# Altium PCB VCO_BFR92_pcb.PcbDoc
Units mil, origin at the board's own origin, x right, y up, seen from the top; angles counter-clockwise.
Board outline 2385 x 1195 mil, 2 copper layers (Top Layer, Bottom Layer); 40 components, 21 nets, 91 pads, 81 vias.
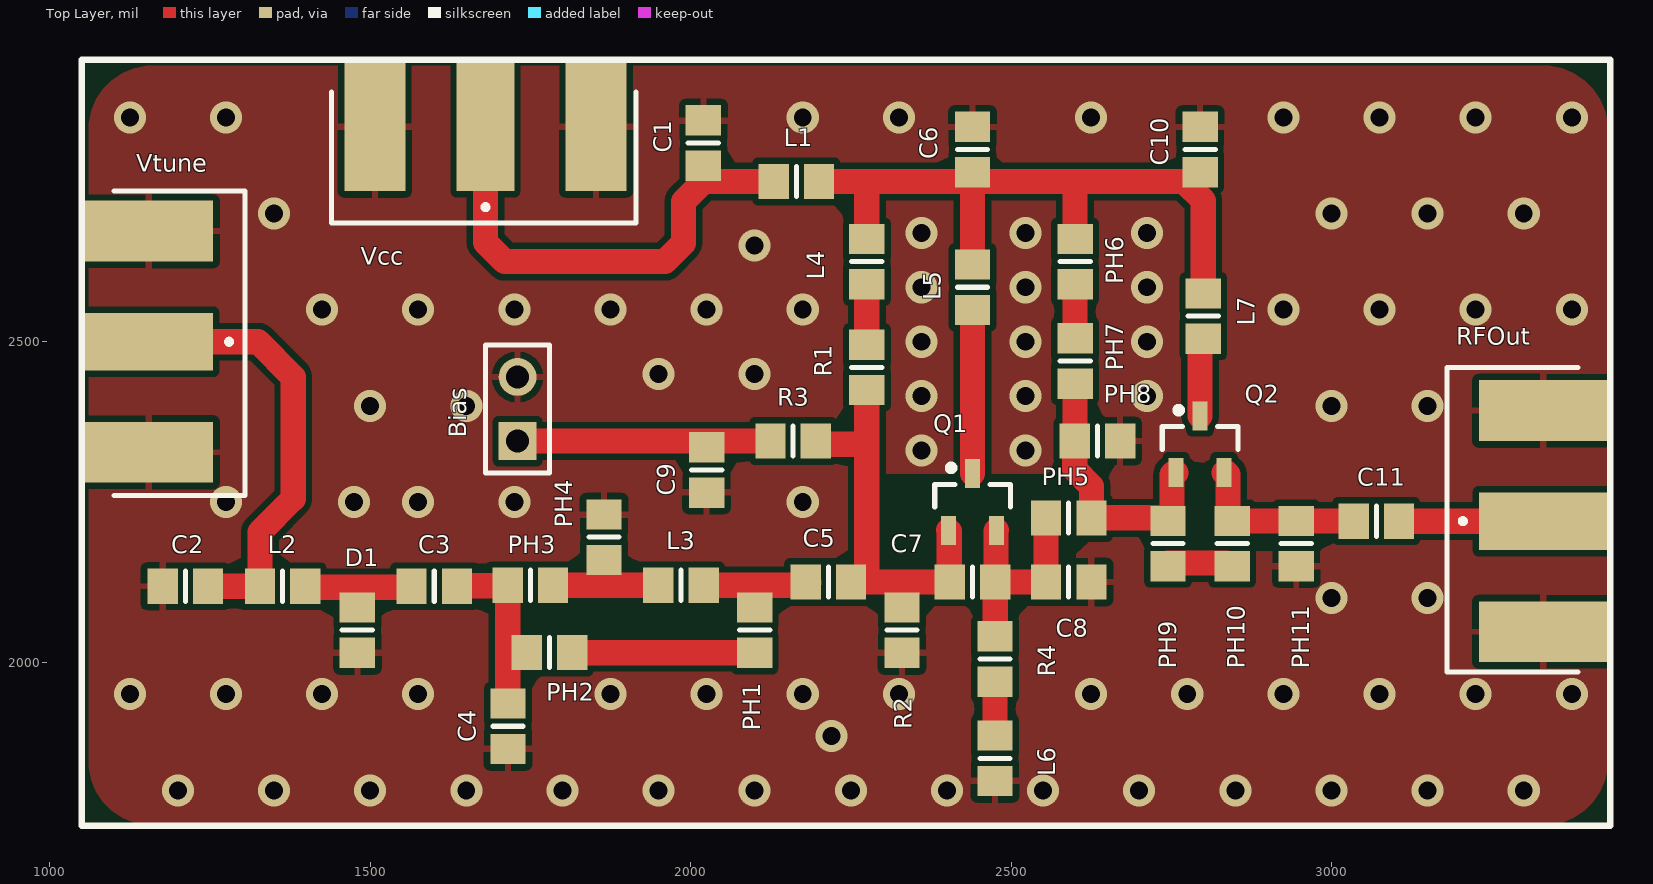
[diagram p0: Top Layer view]
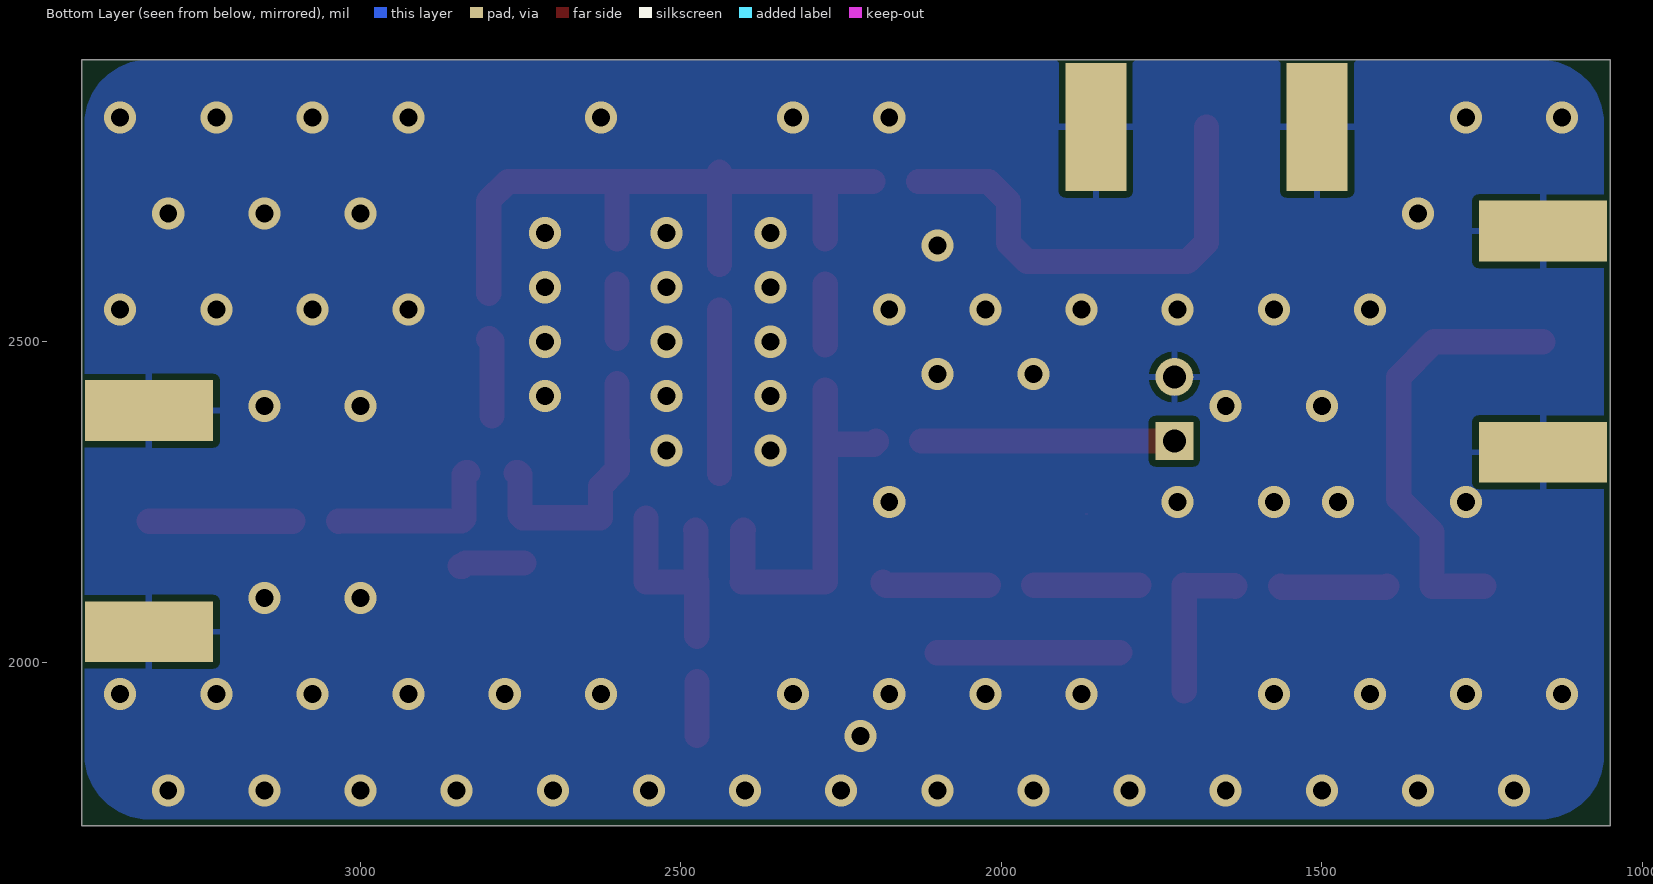
[diagram p1: Bottom Layer view, seen from below]

## Layer stack, top to bottom
Top Solder: solder mask 0.4, Solder Resist, Dk 3.5
Top Layer: signal copper 1.4
Dielectric 1: dielectric 12.6, FR-4, Dk 4.8
Bottom Layer: signal copper 1.4
Bottom Solder: solder mask 0.4, Solder Resist, Dk 3.5

## Board outline
1050,1745 1050,2940 3435,2940 3435,1745

## Design rules (kind name [scope] priority, off if disabled: settings)
Clearance [All] p1: gap=10 ignorepadtopadclearanceinfootprint=FALSE except(0: Arc-Hole Track-Hole SMDPad-Hole THPad-Hole Via-Hole Fill-Hole Poly-Hole Region-Hole Text-Hole)
PolygonConnect PolygonConnect_Via [IsPolygon vs IsVia] p1: connectstyle=Direct reliefconductorwidth=10 reliefentries=4 polygonreliefangle="90 Angle" airgapwidth=10
PolygonConnect [All] p2: connectstyle=Relief reliefconductorwidth=10 reliefentries=4 polygonreliefangle="90 Angle" airgapwidth=10
RoomDefinition VCO_BFR92_sh [InComponentClass('VCO_BFR92_sh')] p1: confinementstyle=ConfineIn formatcopy=TRUE lockcomponents=FALSE outline 175,996.02 4105,996.02 4105,3650 175,3650
RoutingVias [All] p1: holewidth=28 width=50 viastyle="Through Hole" minholewidth=28 minwidth=50 maxholewidth=28 maxwidth=50
SolderMaskExpansion [All] p1: expansion=4
Width [All] p1: maxlimit=78.74 minlimit=10 preferedwidth=10
30 further rules are at their usual default settings.

## Components (designator, comment, footprint, x,y, rotation, side; value= is the part's Value field where it differs from the comment)
Bias "Header 2" HDR1X2 1730,2345 r90 top
C1 "Cap Pol2" 6-0805_N 2020,2810 r90 top value=47nF
C2 "Cap Pol2" 6-0805_N 1211.68,2118.43 r180 top value=47nF
C3 "Cap Pol2" 6-0805_N 1600,2118.43 r0 top value=4.3pF
C4 "Cap Pol2" 6-0805_N 1715,1900 r270 top value=0.6pF
C5 "Cap Pol2" 6-0805_N 2215,2125 r0 top value=100pF
C6 "Cap Pol2" 6-0805_N 2440,2800 r90 top value=47pF
C7 "Cap Pol2" 6-0805_N 2440,2125 r0 top value=1pF
C8 "Cap Pol2" 6-0805_N 2590,2125 r0 top value=3pF
C9 "Cap Pol2" 6-0805_N 2025,2300 r270 top value="no mounted"
C10 "Cap Pol2" 6-0805_N 2795,2800 r90 top value=47pF
C11 "Cap Pol2" 6-0805_N 3070,2220 r0 top value=33pF
D1 "D Varactor" 6-0805_N 1480,2050 r270 top
L1 "Inductor" 6-0805_N 2165,2750 r0 top value=10mH
L2 "Inductor" 6-0805_N 1363.43,2118.43 r0 top value=100nH
L3 "Inductor" 6-0805_N 1985,2120 r0 top value=10mH
L4 "Inductor" 6-0805_N 2275,2625 r90 top value=10mH
L5 "Inductor" 6-0805_N 2440,2585 r90 top value=10mH
L6 "Inductor" 6-0805_N 2475,1850 r90 top value=10mH
L7 "Inductor" 6-0805_N 2800,2540 r90 top value=10mH
PH1 "Res1" 6-0805_N 2100,2050 r90 top value=0
PH2 "0" 6-0805_N 1780,2015 r0 top value=1K
PH3 "Res1" 6-0805_N 1750,2120 r180 top value=1K
PH4 "Res1" 6-0805_N 1865,2195 r270 top value=0
PH5 "Res1" 6-0805_N 2590,2225 r180 top value=1K
PH6 "Res1" 6-0805_N 2600,2625 r90 top value=1K
PH7 "Res1" 6-0805_N 2600,2470 r90 top value=1K
PH8 "Res1" 6-0805_N 2635,2345 r180 top value=1K
PH9 "Res1" 6-0805_N 2745,2185 r270 top value=1K
PH10 "Res1" 6-0805_N 2845,2185 r270 top value=1K
PH11 "Res1" 6-0805_N 2945,2185 r270 top value=1K
Q1 "NPN" SOT23_N 2440,2250 r90 top
Q2 "NPN" SOT23_N 2795,2340 r90 top
R1 "Res1" 6-0805_N 2275,2460 r90 top value=1.5K
R2 "Res1" 6-0805_N 2330,2050 r90 top value=2.7K
R3 "Res1" 6-0805_N 2160,2345 r180 top value=1K
R4 "Res1" 6-0805_N 2475,2005 r90 top value=220
RFOut "SMB" SMA-142-0701-851 3330,2220 r90 top
Vcc "SMB" SMA-142-0701-851 1680,2835 r180 top
Vtune "SMB" SMA-142-0701-851 1155,2500 r270 top

## Footprints (in the part's own frame and the unit in brackets; to place one, negate y for a bottom-side part, rotate by r counter-clockwise, add the part's x,y. Pads: shape width x height; smd on the part's side, far side on the other; paste and mask are expansions set on the pad)
6-0805_N [mm] "Chip Resistor, Body 2.0x1.2mm, IPC Medium Density"
  rect 1.2x1.4 smd: 1(-0.9,0) 2(0.9,0)
  silkscreen extent 0,-0.6 0,0.6, body extent -1.07,-0.7 1.07,0.7, height 0.7
HDR1X2 [mm] "Connector; Header; 2 Position"
  rect 1.5x1.5 hole 0.9: 1(0,0)
  round 1.5 hole 0.9: 2(2.54,0)
  silkscreen extent -1.27,-1.27 3.81,1.27
SMA-142-0701-851 [mil] "SMA 50 Ohm, End Launch Jack Receptacle, Tab Contact"
  rect 90x200 smd: 1(0,0)
  rect 95x200 smd: 2(-172.5,0) 2(172.5,0)
  rect 95x200 smd far side: 2(-172.5,0) 2(172.5,0)
  silkscreen extent -235,-55 240,150, body extent -187,-475 188,87, height 161
SOT23_N [mm] "SOT23, 3-Leads, Body 2.9x1.3mm, Pitch 0.95mm, Lead Span 2.3mm - Reverse Pinning, IPC Medium Density"
  rect 1.15x0.6 smd: 1(1.125,0) 2(-1.125,-0.95) 3(-1.125,0.95)
  silkscreen extent -0.2,-1.5 1.47,1.5, body extent -0.7,-1.5 0.7,1.5, height 1.1

## Part data
Bias: "Header, 2-Pin", LatestRevisionDate=17-Jul-2002, LatestRevisionNote="Re-released for DXP Platform.", Publisher="Altium Limited"
C1 C2 C3 C4 C5 C6 C7 C8 C9 C10 C11: "Polarized Capacitor (Axial)", LatestRevisionDate=17-Jul-2002, LatestRevisionNote="Re-released for DXP Platform.", PackageDescription="Polarized Capacitor; 2 Leads", PackageReference=POLAR0.8, Published=8-Jun-2000, Publisher="Altium Limited"
D1: "Variable Capacitance Diode", ComponentLink1Description="Manufacturer Link", ComponentLink1URL=http://www.zetex.com/, DatasheetVersion=Jan-1998, LatestRevisionDate=29-May-2009, LatestRevisionNote="IPC-7351 Footprint Added.", Note="Pin 2 is not connected and not drawn.", PackageDescription="3-Pin SOT-23 Package 0.95 mm Pitch, 2.3 mm Lead Span - Reverse Pinning", PackageReference=SOT23A, PackageVersion=1996, Published=8-Jun-2000, Publisher="Altium Limited"
PH1 PH3 PH4 PH5 PH6 PH7 PH8 PH9 PH10 PH11 R1 R2 R3 R4: "Resistor", LatestRevisionDate=17-Jul-2002, LatestRevisionNote="Re-released for DXP Platform.", PackageDescription="Axial Device, Thru-Hole; 2 Leads; 0.3 in Pin Spacing", PackageReference=AXIAL-0.3, Published=8-Jun-2000, Publisher="Altium Limited"
PH2: library part Res1, "Resistor", LatestRevisionDate=17-Jul-2002, LatestRevisionNote="Re-released for DXP Platform.", PackageDescription="Axial Device, Thru-Hole; 2 Leads; 0.3 in Pin Spacing", PackageReference=AXIAL-0.3, Published=8-Jun-2000, Publisher="Altium Limited"
Q1 Q2: "NPN Bipolar Transistor", Code_JEDEC=TO-226-AA, LatestRevisionDate=17-Jul-2002, LatestRevisionNote="Re-released for DXP Platform.", PackageDescription="TO, Flat Index; 3 In-Line, Axial Leads; Body Dia. 4.8mm; Leads 0.55 x 0.51 mm (max)", PackageReference=TO-226-AA, Published=8-Jun-2000, Publisher="Altium Limited"
RFOut Vcc Vtune: "SMB Straight Connector", LatestRevisionDate=17-Jul-2002, LatestRevisionNote="Re-released for DXP Platform.", Publisher="Altium Limited"
L1 L2 L3 L4 L5 L6 L7: Code_IEC=1005, Code_JEITA=0402, LatestRevisionDate=29-May-2009, LatestRevisionNote="IPC-7351 Footprint Added.", PackageDescription="Chip Inductor", PackageReference=0402-A, Published=8-Jun-2000, Publisher="Altium Limited"

## Via types
v1: diameter 50, hole 28, Top Layer to Bottom Layer, 81 vias

## Nets (pads, with @x,y where several pads share a name; then routed paths per layer and width w, separated by ;. In a path a pad name is that pad's centre, name@x,y a point inside that pad or via, vN(x,y) a via of type N, cw(c..) or ccw(c..) an arc to the next point about the centre after c; other vN are vias at no path point)
B: C5.2 C7.1 Q1.3 R1.1 R2.2 R3.1 | length 592.9
  Top Layer w39.37: R3.1 2195.43,2343.94 2199.37,2340 2275,2340 ; R1.1 2275,2340 ; Q1.3 2403.58,2204.72 2403.58,2125.98 C7.1 2275,2125 2275,2340
C: L5.1 Q1.1 | length 255.3
  Top Layer w39.37: Q1.1 L5.1
GND: Bias.2 C1.2 C2.2 C4.2 C6.2 C8.2 C9.2 C10.2 D1.2 L6.1 PH4.1 PH8.1 PH11.2 R2.1 RFOut.2 Vcc.2 Vtune.2 | length 3.9
  Top Layer w0: PH4.1 PH4.1@1868.94,2230.43
  other v1: 1200,1800 1350,1800 1500,1800 1650,1800 1800,1800 1950,1800 2100,1800 2250,1800 2400,1800 2550,1800 2700,1800 2850,1800 3000,1800 3150,1800 3300,1800 2220,1885 1125,1950 1275,1950 1425,1950 1575,1950 1875,1950 2025,1950 2175,1950 2325,1950 2625,1950 2775,1950 2925,1950 3075,1950 3225,1950 3375,1950 3000,2100 3150,2100 1275,2250 1475,2250 1575,2250 1725,2250 2175,2250 2360,2330 2522.5,2330 1500,2400 1650,2400 3000,2400 3150,2400 2360,2415 2522.5,2415 2712.5,2415 1950,2450 2100,2450 2360,2500 2522.5,2500 2712.5,2500 1425,2550 1575,2550 1725,2550 1875,2550 2025,2550 2175,2550 2925,2550 3075,2550 3225,2550 3375,2550 2360,2585 2522.5,2585 2712.5,2585 2100,2650 2360,2670 2522.5,2670 2712.5,2670 1350,2700 3000,2700 3150,2700 3300,2700 1125,2850 1275,2850 2175,2850 2325,2850 2625,2850 2925,2850 3075,2850 3225,2850 3375,2850
NetBias_1: Bias.1 C9.1 R3.2 | length 394.6
  Top Layer w39.37: Bias.1 R3.2
NetC1_1: C1.1 L1.1 Vcc.1 | length 731.8
  Top Layer w39.37: Vcc.1 1680,2655 1710,2625 1960,2625 1988.75,2653.75 1988.75,2718.75 2020,2750 L1.1
NetC2_1: C2.1 L2.1 Vtune.1 | length 676.8
  Top Layer w39.37: Vtune.1 1325,2500 1380,2445 1380,2255 1327.99,2202.99 L2.1 ; C2.1 L2.1
NetC3_1: C3.1 D1.1 L2.2 | length 166.9
  Top Layer w39.37: L2.2 1400.34,2116.95 1563.09,2116.95 C3.1
NetC3_2: C3.2 C4.1 PH2.1 PH3.2 | length 244.4
  Top Layer w39.37: C3.2 1636.22,2119.21 1713.78,2119.21 PH3.2 1714.57,1955.67 C4.1@1714.78,1955.45
NetC5_1: C5.1 L3.2 PH1.2 | length 166.8
  Top Layer w39.37: L3.2 2180.63,2120 2184.57,2123.94 C5.1@2184.57,2125
NetC6_1: C6.1 C10.1 L1.2 L4.2 L5.2 L7.2 PH6.2 | length 1079.8
  Top Layer w39.37: L1.2 2275,2750 ; L4.2 2275,2750 ; L5.2 C6.1@2440,2750 ; C6.1 C6.1@2440,2750 ; PH6.2 2600,2750 ; L7.2 2800,2720 2770,2750 2600,2750 ; 2275,2750 C6.1@2440,2750 ; C6.1@2440,2750 2575,2750 2600,2750
NetC7_2: C7.2 C8.1 PH5.2 Q1.2 R4.2 | length 345.4
  Top Layer w39.37: R4.2 2475.22,2040.65 2475.22,2124.78 C7.2 ; Q1.2 2476.42,2204.72 2476.42,2125.98 C7.2 ; PH5.2 C8.1 C7.2
NetC11_1: C11.1 PH10.1 PH11.1 Q2.2 | length 273.6
  Top Layer w39.37: Q2.2 2835.75,2295.71 2838.7,2292.76 2838.7,2224.37 2842.64,2220.43 PH10.1 2845.22,2220.22 3034.35,2220.22 C11.1
NetC11_2: C11.2 RFOut.1 | length 224.6
  Top Layer w39.37: C11.2 RFOut.1
NetL3_1: L3.1 PH3.1 PH4.2 | length 164.1
  Top Layer w39.37: PH3.1@1785.45,2120.02 L3.1@1949.55,2120.02
NetL4_1: L4.1 R1.2 | length 94.1
  Top Layer w39.37: R1.2 L4.1
NetL6_2: L6.2 R4.1 | length 84.1
  Top Layer w39.37: L6.2 R4.1
NetL7_1: L7.1 Q2.1 | length 123
  Top Layer w39.37: Q2.1 2795,2500.63 2798.94,2504.57 L7.1
NetPH1_1: PH1.1 PH2.2 | length 284.7
  Top Layer w39.37: PH2.2 1815.65,2014.78 2099.78,2014.78 PH1.1
NetPH5_1: PH5.1 PH7.1 PH8.2 PH9.1 Q2.3 | length 418.6
  Top Layer w39.37: PH7.1 2600,2345.43 PH8.2 2599.57,2300.43 2625.65,2274.35 2625.65,2225.22 2744.78,2225.22 2745,2225.43 2747.36,2225.43 2751.3,2229.37 2751.3,2292.76 2754.25,2295.71 Q2.3
NetPH6_1: PH6.1 PH7.2 | length 84.1
  Top Layer w39.37: PH7.2 PH6.1
NetPH9_2: PH9.2 PH10.2 | length 102.1
  Top Layer w39.37: PH9.2@2745,2154.57 2836.06,2154.57 2841.06,2149.57 PH10.2

## Polygon pours and split planes (outlines as drawn)
GND on Bottom Layer "GND_L02_P001" (solid, pour order 1): 1160,1755 cw(c1160,1855) 1060,1855 1060,2840 cw(c1160,2840) 1160,2940 3330,2940 cw(c3330,2840) 3430,2840 3430,1855 cw(c3330,1855) 3330,1755
GND on Top Layer "GND_L01_P000" (solid, remove dead copper, pour order 0): 1160.75,1745.59 cw(c1160.75,1845.59) 1060.75,1845.59 1060.75,2830.59 cw(c1160.75,2830.59) 1160.75,2930.59 3330.75,2930.59 cw(c3330.75,2830.59) 3430.75,2830.59 3430.75,1845.59 cw(c3330.75,1845.59) 3330.75,1745.59

## Other copper
Top Layer:
  pour cut-out: 2304.94,2154.94 2304.94,2294.29 2570.43,2294.29

## Silkscreen, mask and mechanical layers (free items; w line width, h text height)
Top Overlay:
  lines w10: 1050,1745 1050,2940 1435,2940 3435,2940 3435,1745 1050,1745

## Dimensions
1050,2940 to 1050,1745 on Top Overlay
1053.37,3334.01 to 3436.72,3355.16 on Top Overlay

## Text inside footprints (layer, text, board x,y; h text height)
RFOut: Mechanical 13 "PCB EDGE" at 3420,2480 h24 r180
Vcc: Mechanical 13 "PCB EDGE" at 1420,2925 h24 r270
Vtune: Mechanical 13 "PCB EDGE" at 1065,2240 h24